# Altium PCB pedal.PcbDoc
Units mm, origin at the board's own origin, x right, y up, seen from the top; angles counter-clockwise.
Board outline 152.4 x 101.6 mm, 2 copper layers (Top Layer, Bottom Layer); 31 components, 20 nets, 71 pads, 0 vias.
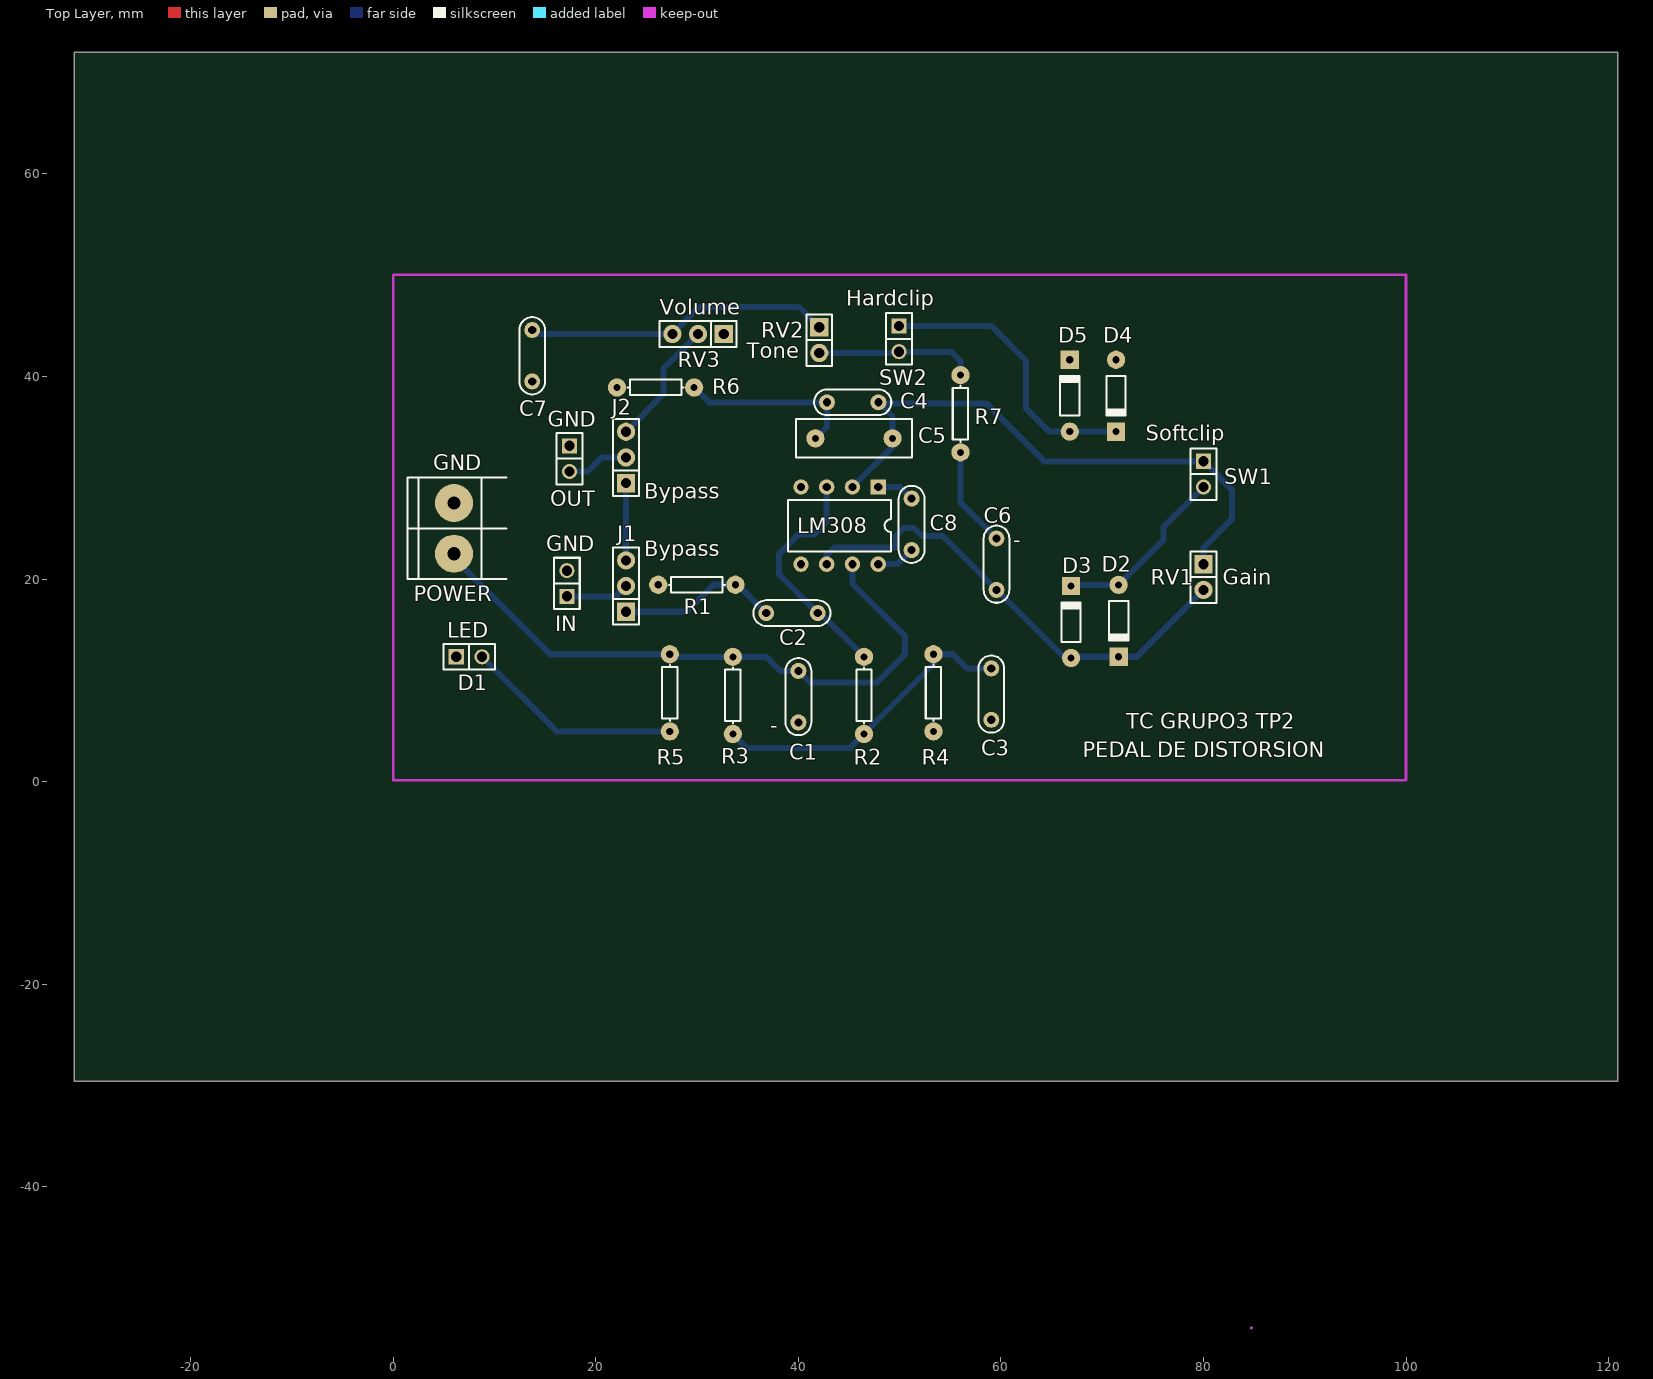
[diagram p0: Top Layer view]
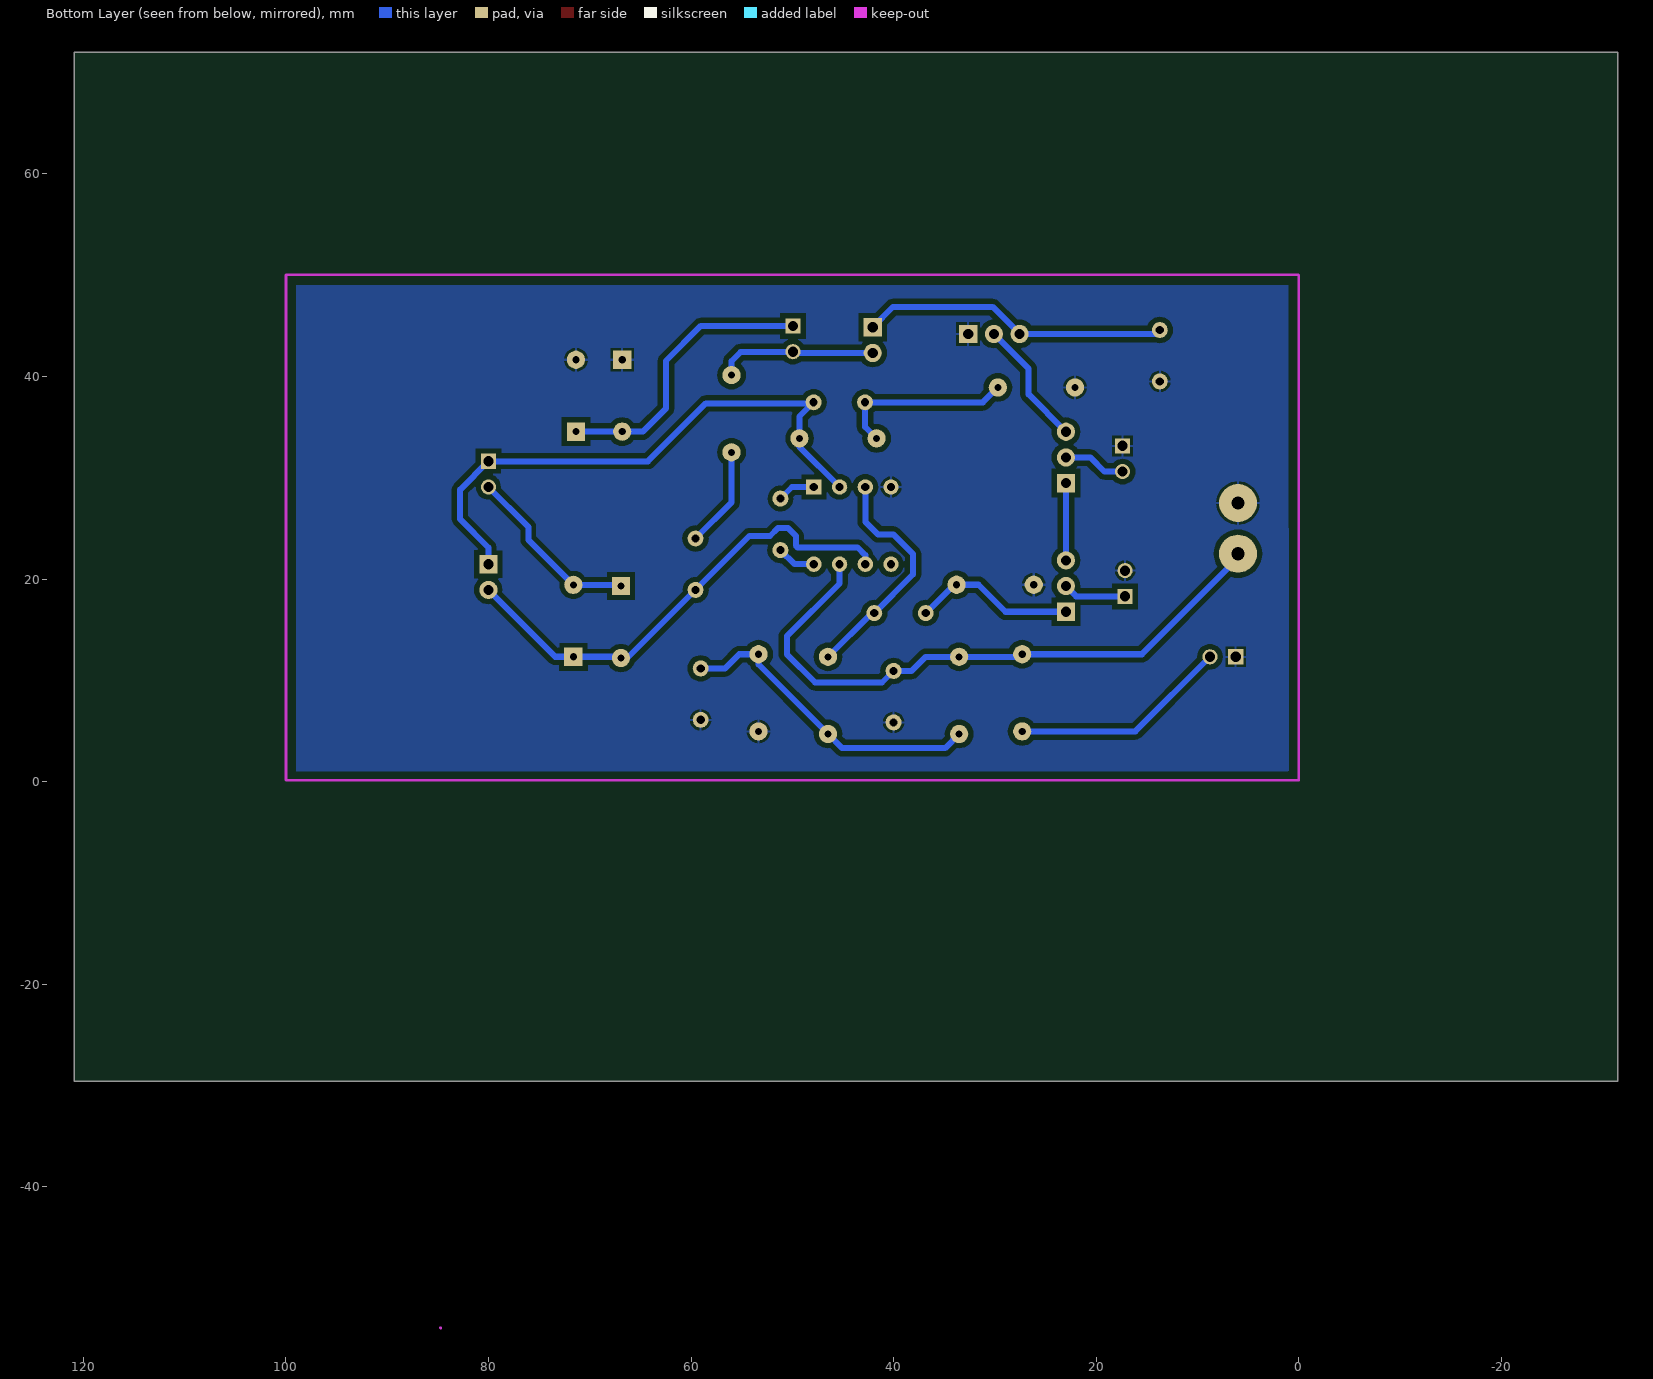
[diagram p1: Bottom Layer view, seen from below]
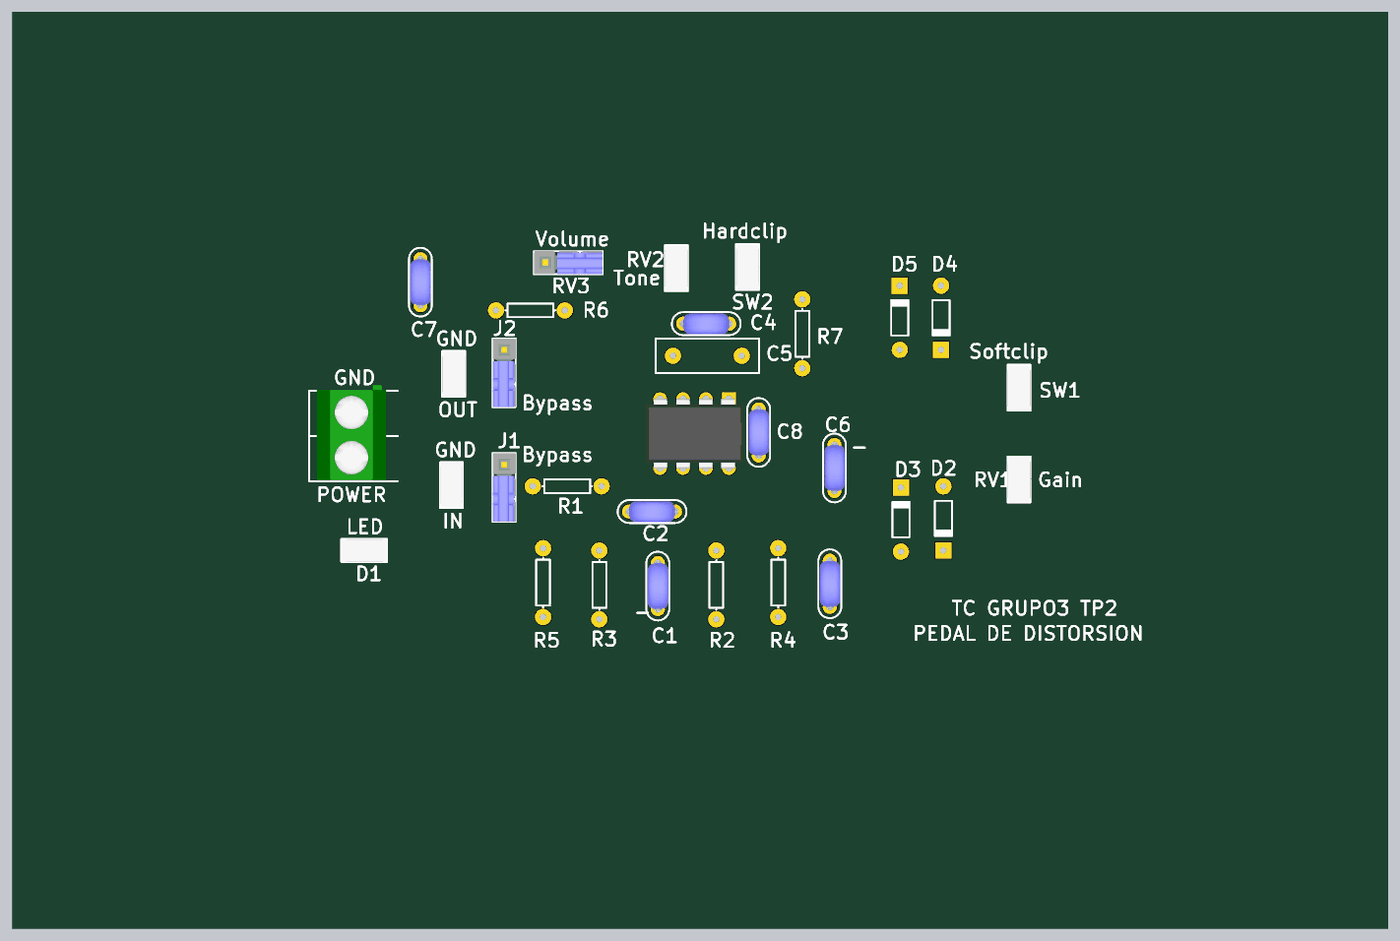
[diagram p2: 3D render of the assembled board from above, using the file's embedded part models]

## Layer stack, top to bottom
Top Solder: solder mask 0.0102, Solder Resist, Dk 3.5
Top Layer: signal copper 0.0356
Dielectric 1: dielectric 0.32, FR-4, Dk 4.8
Bottom Layer: signal copper 0.0356
Bottom Solder: solder mask 0.0102, Solder Resist, Dk 3.5

## Board outline
-31.496,-29.591 120.904,-29.591 120.904,72.009 -31.496,72.009

## Design rules (kind name [scope] priority, off if disabled: settings)
Clearance "Polygon Clearance" [InPolyGon] p1: gap=0.5
Clearance [All] p2: gap=0.3
PlaneClearance [All] p1: clearance=0.6
PlaneConnect [All] p1: planeconnectstyle=Relief reliefexpansion=0.5 reliefentries=4 reliefconductorwidth=0.3 reliefairgap=0.3
PolygonConnect [All] p1: connectstyle=Relief reliefconductorwidth=0.254 reliefentries=4 polygonreliefangle="90 Angle" airgapwidth=0.254
RoutingLayers [All] p1: top layer_v5=FALSE bottom layer_v5=TRUE
RoutingVias [All] p1: holewidth=0.7 width=2 viastyle="Through Hole" minholewidth=0.7 minwidth=2 maxholewidth=0.7 maxwidth=2
SolderMaskExpansion [All] p1: expansion=0.102
Width [All] p1: maxlimit=0.6 minlimit=0.6 preferedwidth=0.6
27 further rules are at their usual default settings.

## Components (designator, comment, footprint, x,y, rotation, side; value= is the part's Value field where it differs from the comment)
C1 "" CAP200 40.005,8.382 r90 top
C2 "" CAP200 39.37,16.637 r0 top
C3 "" CAP200 59.055,8.636 r90 top
C4 "" CAP200 45.366,37.445 r0 top
C5 "" RAD-0.3 45.493,33.889 r0 top
C6 "" CAP200 59.563,21.463 r90 top
C7 "" CAP200 13.717,42.046 r90 top
C8 "" CAP200 51.181,25.4 r90 top
D1 "" JUMPER2#1 7.493,12.319 r0 top
D2 "1N4148" DO-35 71.628,15.875 r270 top
D3 "1N4148" DO-35 66.929,15.748 r90 top
D4 "1N4148" DO-35 71.374,38.1 r270 top
D5 "1N4148" DO-35 66.802,38.1 r90 top
IN "GND" JUMPER2#1 17.145,19.558 r90 top
J1 "BYPASS" JUMPER3 22.987,19.304 r90 top
J2 "BYPASS" JUMPER3 22.987,32.004 r90 top
LM308 "" DIP8 47.879,29.083 r270 top
OUT "GND" JUMPER2#1 17.399,31.877 r270 top
POWER "GND" BORNERA2 6,25 r0 top
R1 "" AXIAL-0.3 29.972,19.431 r0 top
R2 "" AXIAL-0.3 46.482,8.509 r270 top
R3 "" AXIAL-0.3 33.528,8.509 r90 top
R4 "" AXIAL-0.3 53.34,8.763 r90 top
R5 "" AXIAL-0.3 27.305,8.763 r90 top
R6 "" AXIAL-0.3 25.902,38.915 r0 top
R7 "" AXIAL-0.3 56.007,36.322 r90 top
RV1 "" JUMPER2#2 80.01,20.193 r270 top
RV2 "" JUMPER2#2 42.067,43.591 r270 top
RV3 "" JUMPER3 30.099,44.196 r180 top
SW1 "" JUMPER2#1 80.01,30.353 r270 top
SW2 "" JUMPER2#1 49.941,43.718 r270 top

## Footprints (in the part's own frame and the unit in brackets; to place one, negate y for a bottom-side part, rotate by r counter-clockwise, add the part's x,y. Pads: shape width x height; smd on the part's side, far side on the other; paste and mask are expansions set on the pad)
AXIAL-0.3 [mm] "Axial Device, Thru-Hole; 2 Leads; 0.3 in Pin Spacing"
  round 1.8 hole 0.7: 1(-3.81,0) 2(3.81,0)
  silkscreen extent -2.77,-0.76 2.77,0.76
BORNERA2 [mm] "Bornera con Tornillos 5mm separación"
  round 3.75 hole 1.3: 1(0,2.5) 2(0,-2.5)
  silkscreen extent -4.6,-5 5.2,5, body extent -3.76,-4.89 3.94,5.61, height 10
CAP200 [mil]
  round 62 hole 32: 1(-100,0) 2(100,0)
  silkscreen extent -150,-50 150,50, body extent -110,-46 110,44, height 246
DIP8 [mil]
  rect 60x60 hole 32: 1(0,0)
  round 60 hole 32: 2(0,-100) 3(0,-200) 4(0,-300) 5(300,-300) 6(300,-200) 7(300,-100) 8(300,0)
  silkscreen extent 50,-350 250,50, body extent -3,-363 303,63, height 177
DO-35 [mm] "Diode, Axial; Body 3.8 x 1.9 mm (LxDia. max), Lead Dia. 0.53 mm (max)"
  round 1.8 hole 0.7: 1(-3.55,0)
  rect 1.8x1.8 hole 0.7: 2(3.55,0)
  silkscreen extent -1.95,-0.95 2.05,0.95
JUMPER2#1 [mm]
  rect 1.5x1.5 hole 1.016: 1(-1.27,0)
  round 1.5 hole 1.016: 2(1.27,0)
  silkscreen extent -2.54,-1.27 2.54,1.27, body extent -2.46,-1.27 2.54,1.27, height 9.5
JUMPER2#2 [mm]
  rect 1.8x1.8 hole 1: 1(-1.27,0)
  round 1.8 hole 1: 2(1.27,0)
  silkscreen extent -2.54,-1.27 2.54,1.27, body extent -2.46,-1.27 2.54,1.27, height 9.5
JUMPER3 [mm]
  rect 1.8x1.8 hole 1: 1(-2.54,0)
  round 1.8 hole 1: 2(0,0) 3(2.54,0)
  silkscreen extent -3.81,-1.27 3.81,1.27, body extent -3.81,-1.3 3.81,1.27, height 16.15
RAD-0.3 [mm] "Radial Cap, Thru-Hole; 2 Leads; 0.3 in Pin Spacing"
  round 1.8 hole 0.7: 1(-3.81,0) 2(3.81,0)
  silkscreen extent -5.71,-1.91 5.71,1.91

## Part data
C1 C2 C3 C4 C5 C6 C7: library part Cap, "Capacitor"
C8: library part Cap
D1 IN OUT RV1 RV2 SW1 SW2: library part JUMPER
D2 D3 D4 D5: library part "Diode 1N4148", "High Conductance Fast Diode"
J1 J2 RV3: library part JUMPER3
LM308: library part "Op Amp", "FET Operational Amplifier"
POWER: library part "BORNERA 2"
R1 R2 R3 R4 R5 R6 R7: library part Res1, "Resistor"

## Nets (pads, with @x,y where several pads share a name; then routed paths per layer and width w, separated by ;. In a path a pad name is that pad's centre, name@x,y a point inside that pad or via, vN(x,y) a via of type N, cw(c..) or ccw(c..) an arc to the next point about the centre after c; other vN are vias at no path point)
BYPASS: J1.3 J2.1 | length 7.6
  Bottom Layer w0.6: J1.3 J2.1
GND: C1.1 C3.1 C7.1 D1.1 D4.1 D5.2 IN.2 LM308.4 OUT.1 POWER.1 R1.1 R4.1 R6.1 RV3.1
NetC1_2: C1.2 LM308.7 POWER.2 R3.2 R5.2 | length 62.3
  Bottom Layer w0.6: POWER.2 6,22.067 15.494,12.573 R5.2 27.559,12.319 R3.2 36.83,12.319 38.227,10.922 C1.2 41.148,9.779 47.752,9.779 50.546,12.573 50.546,14.351 45.339,19.558 LM308.7
NetC2_1: C2.1 J1.1 R1.2 | length 16.1
  Bottom Layer w0.6: J1.1 28.956,16.764 31.623,19.431 R1.2 34.036,19.431 C2.1
NetC2_2: C2.2 LM308.3 R2.1 | length 23.2
  Bottom Layer w0.6: LM308.3 42.799,25.654 41.529,24.384 40.005,24.384 38.1,22.479 38.1,20.447 C2.2 42.164,16.637 R2.1
NetC3_2: C3.2 R2.2 R3.1 R4.2 | length 31.1
  Bottom Layer w0.6: R3.1 34.925,3.302 45.085,3.302 R2.2 53.34,11.557 R4.2 55.245,12.573 56.642,11.176 C3.2
NetC4_1: C4.1 C5.1 R6.2 | length 17.8
  Bottom Layer w0.6: R6.2 31.181,37.445 C4.1 42.826,35.032 C5.1
NetC4_2: C4.2 C5.2 LM308.2 RV1.1 SW1.1 | length 57.3
  Bottom Layer w0.6: LM308.2 49.303,33.047 C5.2 49.303,36.048 48.013,37.338 58.547,37.338 64.262,31.623 SW1.1 82.804,28.829 82.804,25.908 80.01,23.114 RV1.1
NetC6_1: C6.1 D2.2 D3.1 LM308.6 RV1.2 | length 47.9
  Bottom Layer w0.6: LM308.6 42.799,22.352 43.561,23.114 49.473,23.114 49.657,23.298 49.657,24.257 50.419,25.019 51.435,25.019 52.207,24.247 54.239,24.247 C6.1 66.288,12.198 D3.1 67.056,12.325 D2.2 73.412,12.325 RV1.2
NetC6_2: C6.2 R7.1 | length 10
  Bottom Layer w0.6: R7.1 56.007,27.559 C6.2
NetC7_2: C7.2 RV2.1 RV3.3 | length 30.4
  Bottom Layer w0.6: C7.2 14.107,44.196 RV3.3 30.226,46.863 40.065,46.863 RV2.1
NetC8_1: C8.1 LM308.8 | length 3.9
  Bottom Layer w0.6: LM308.8 49.784,21.463 C8.1
NetC8_2: C8.2 LM308.1 | length 3.8
  Bottom Layer w0.6: LM308.1 50.038,29.083 C8.2
NetD1_2: D1.2 R5.1 | length 21.6
  Bottom Layer w0.6: D1.2 16.129,4.953 R5.1
NetD2_1: D2.1 D3.2 SW1.2 | length 17.9
  Bottom Layer w0.6: D3.2 67.056,19.425 D2.1 76.073,23.87 76.073,25.146 SW1.2
NetD4_2: D4.2 D5.1 SW2.1 | length 28.5
  Bottom Layer w0.6: SW2.1 59.025,44.988 62.484,41.529 62.484,36.83 64.764,34.55 D5.1 D4.2
NetIN_1: IN.1 J1.2 | length 6.3
  Bottom Layer w0.6: IN.1 21.971,18.288 J1.2
NetJ2_2: J2.2 OUT.2 | length 6.2
  Bottom Layer w0.6: OUT.2 19.177,30.607 20.574,32.004 J2.2
NetJ2_3: J2.3 RV3.2 | length 12.6
  Bottom Layer w0.6: J2.3 26.67,38.227 26.67,40.767 RV3.2
NetR7_2: R7.2 RV2.2 SW2.2 | length 15.8
  Bottom Layer w0.6: RV2.2 49.814,42.321 SW2.2 49.971,42.418 55.118,42.418 56.007,41.529 R7.2
pads on no net: LM308.5

## Polygon pours and split planes (outlines as drawn)
GND on Bottom Layer "GND" (solid, pour order 10): 1,1 99,1 99,48.962 99.06,49.022 1.016,49.022

## Keep-outs
Keep-Out Layer:
  lines w0.254: 0,50 0,0.127 99.949,0.127 ; 0.038,50.038 99.949,50.038 ; 84.709,-53.975 84.76,-53.924 ; 100,0.178 100,49.987

## Silkscreen, mask and mechanical layers (free items; w line width, h text height)
Top Overlay:
  text "Hardclip" at 44.704,46.99 h1.52
  text "Volume" at 26.289,46.101 h1.52
  text "Tone" at 34.925,41.783 h1.52
  text "GND" at 15.24,35.052 h1.52
  text "Softclip" at 74.295,33.655 h1.52
  text "GND" at 3.937,30.734 h1.52
  text "Bypass" at 24.765,27.94 h1.52
  text "-" at 61.214,23.114 h1.52
  text "GND" at 15.113,22.733 h1.52
  text "Bypass" at 24.765,22.225 h1.52
  text "Gain" at 81.915,19.431 h1.52
  text "LED" at 5.334,14.224 h1.52
  text "TC GRUPO3 TP2" at 72.39,5.207 h1.52
  text "-" at 37.211,4.826 h1.52
  text "PEDAL DE DISTORSION" at 68.072,2.413 h1.52